# Altium PCB projet_pcb_naked_f103.PCBDOC
Units mil, origin at the board's own origin, x right, y up, seen from the top; angles counter-clockwise.
Board outline 2640 x 1955 mil, 4 copper layers (TopLayer, POWER, GND, BottomLayer), stack 70.156 mil thick; 39 components, 29 nets, 140 pads, 20 vias.
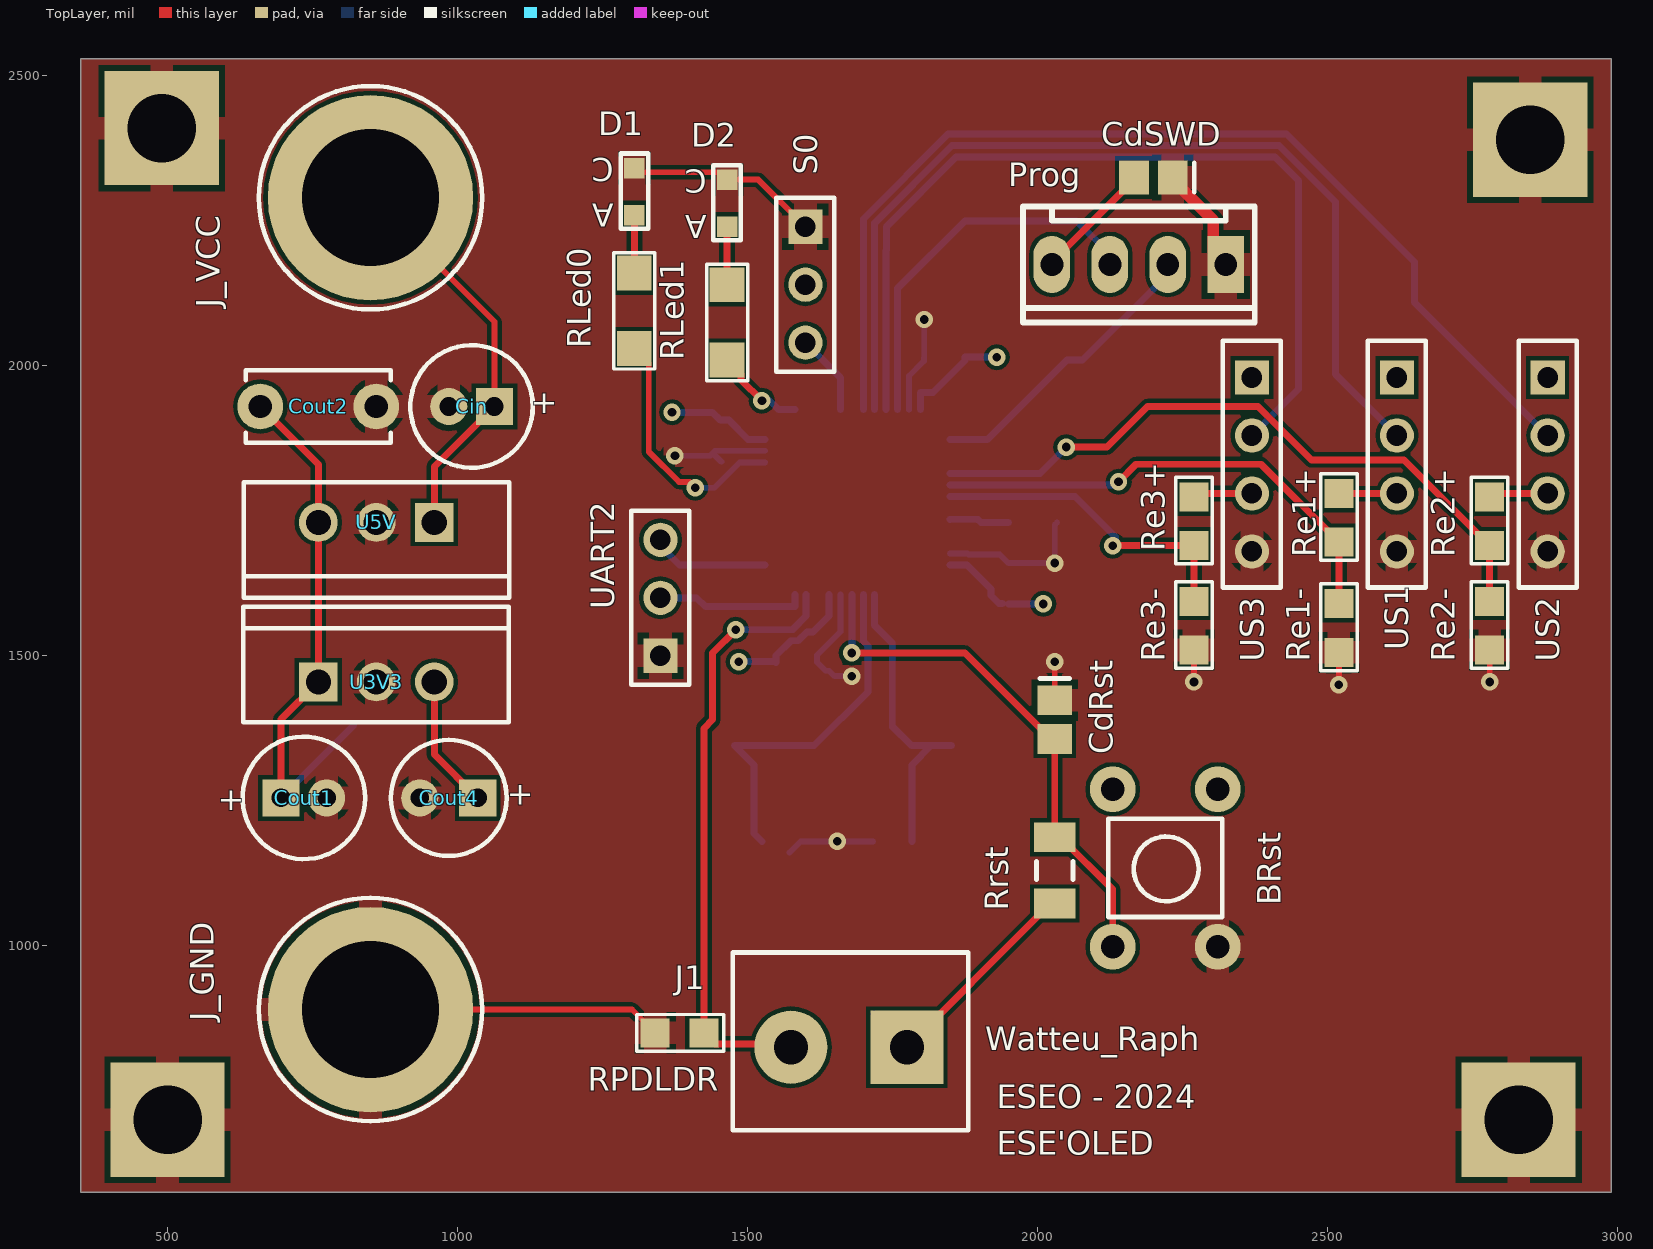
[diagram p0: TopLayer view]
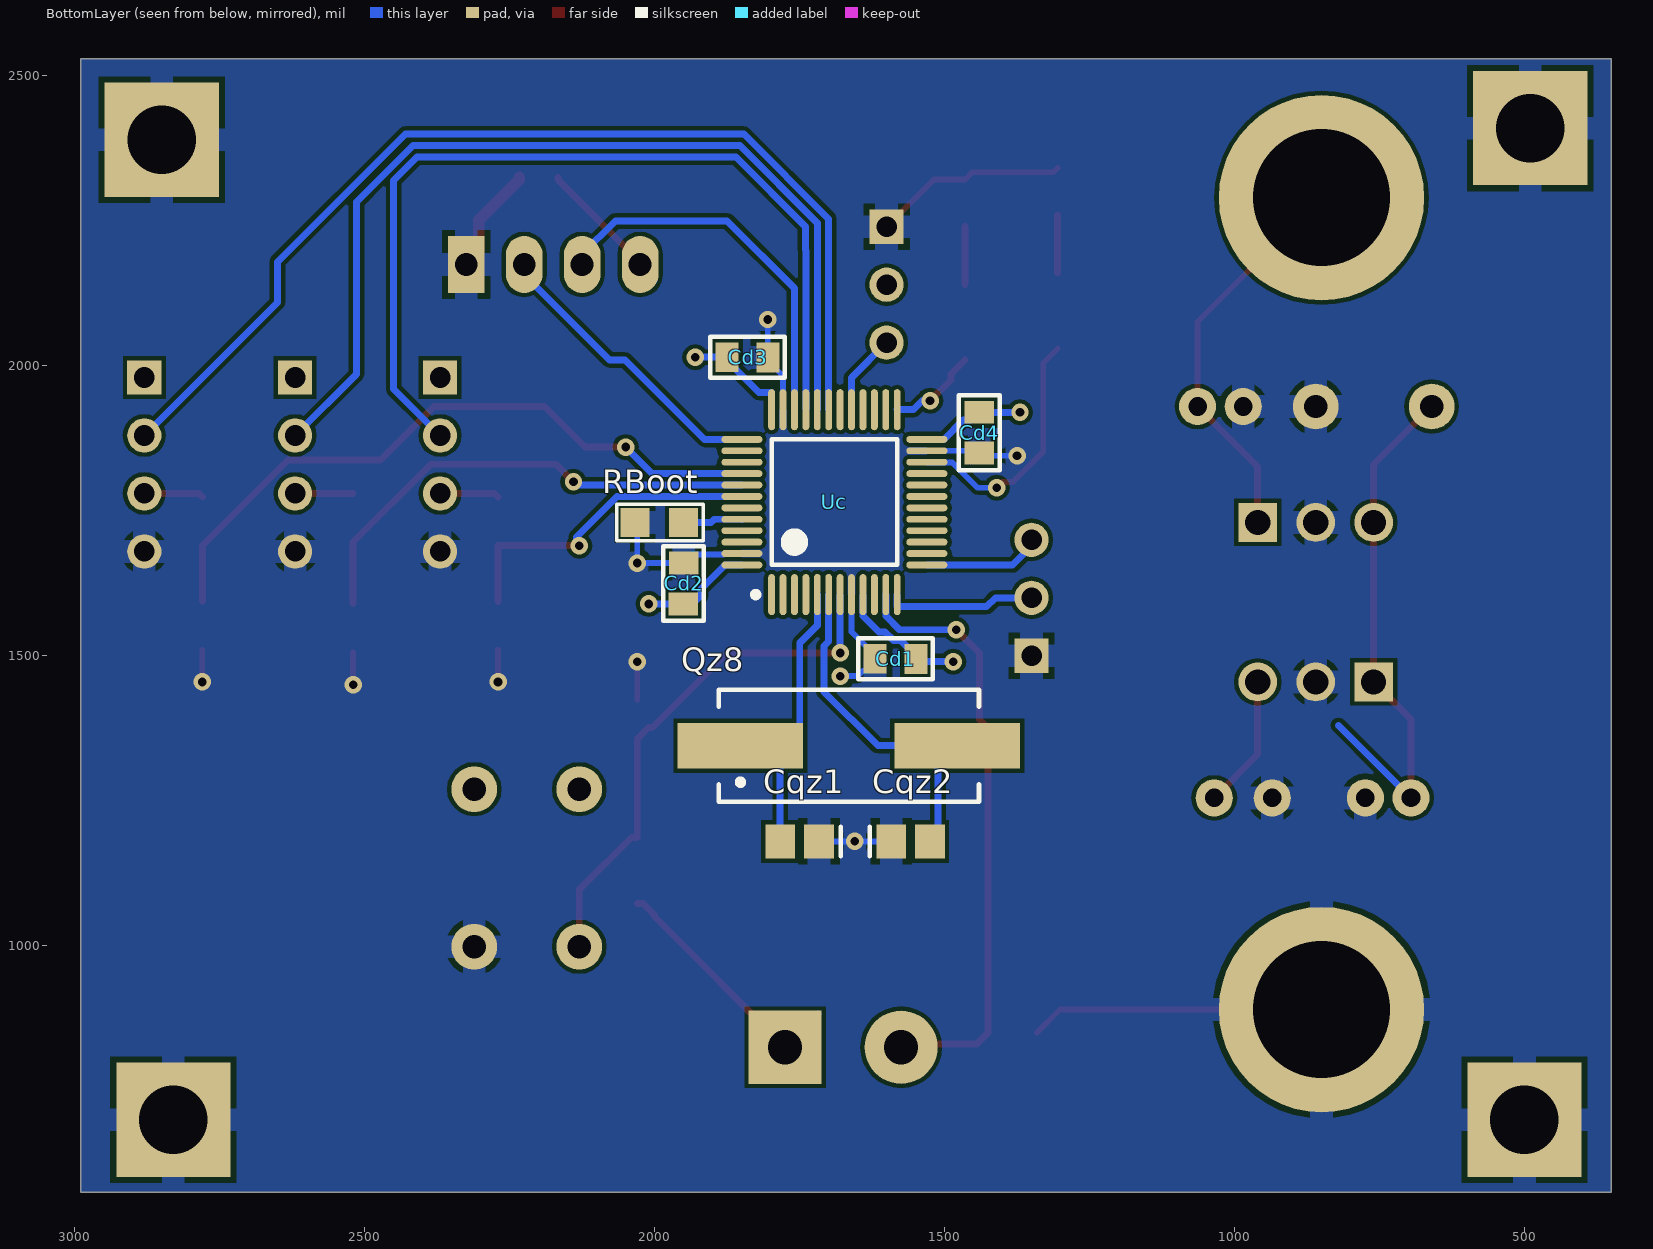
[diagram p1: BottomLayer view, seen from below]
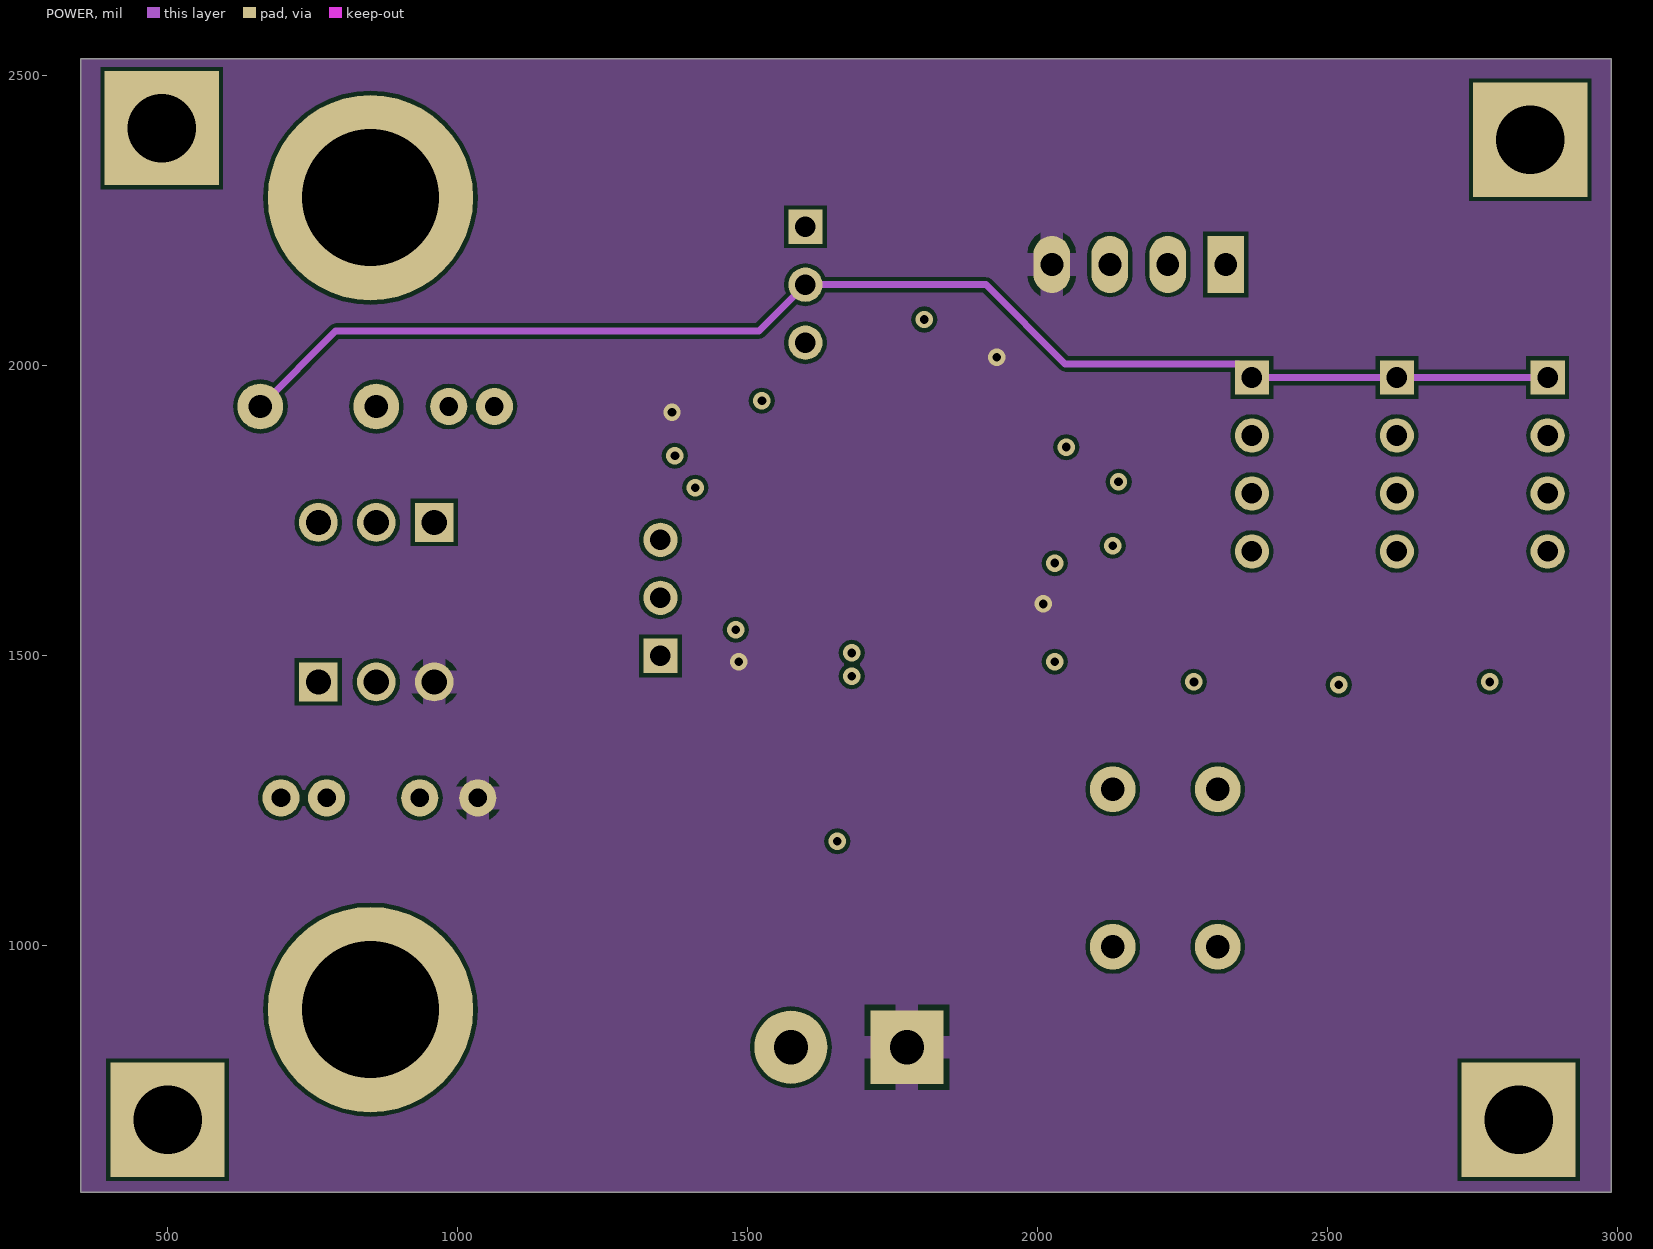
[diagram p2: POWER]
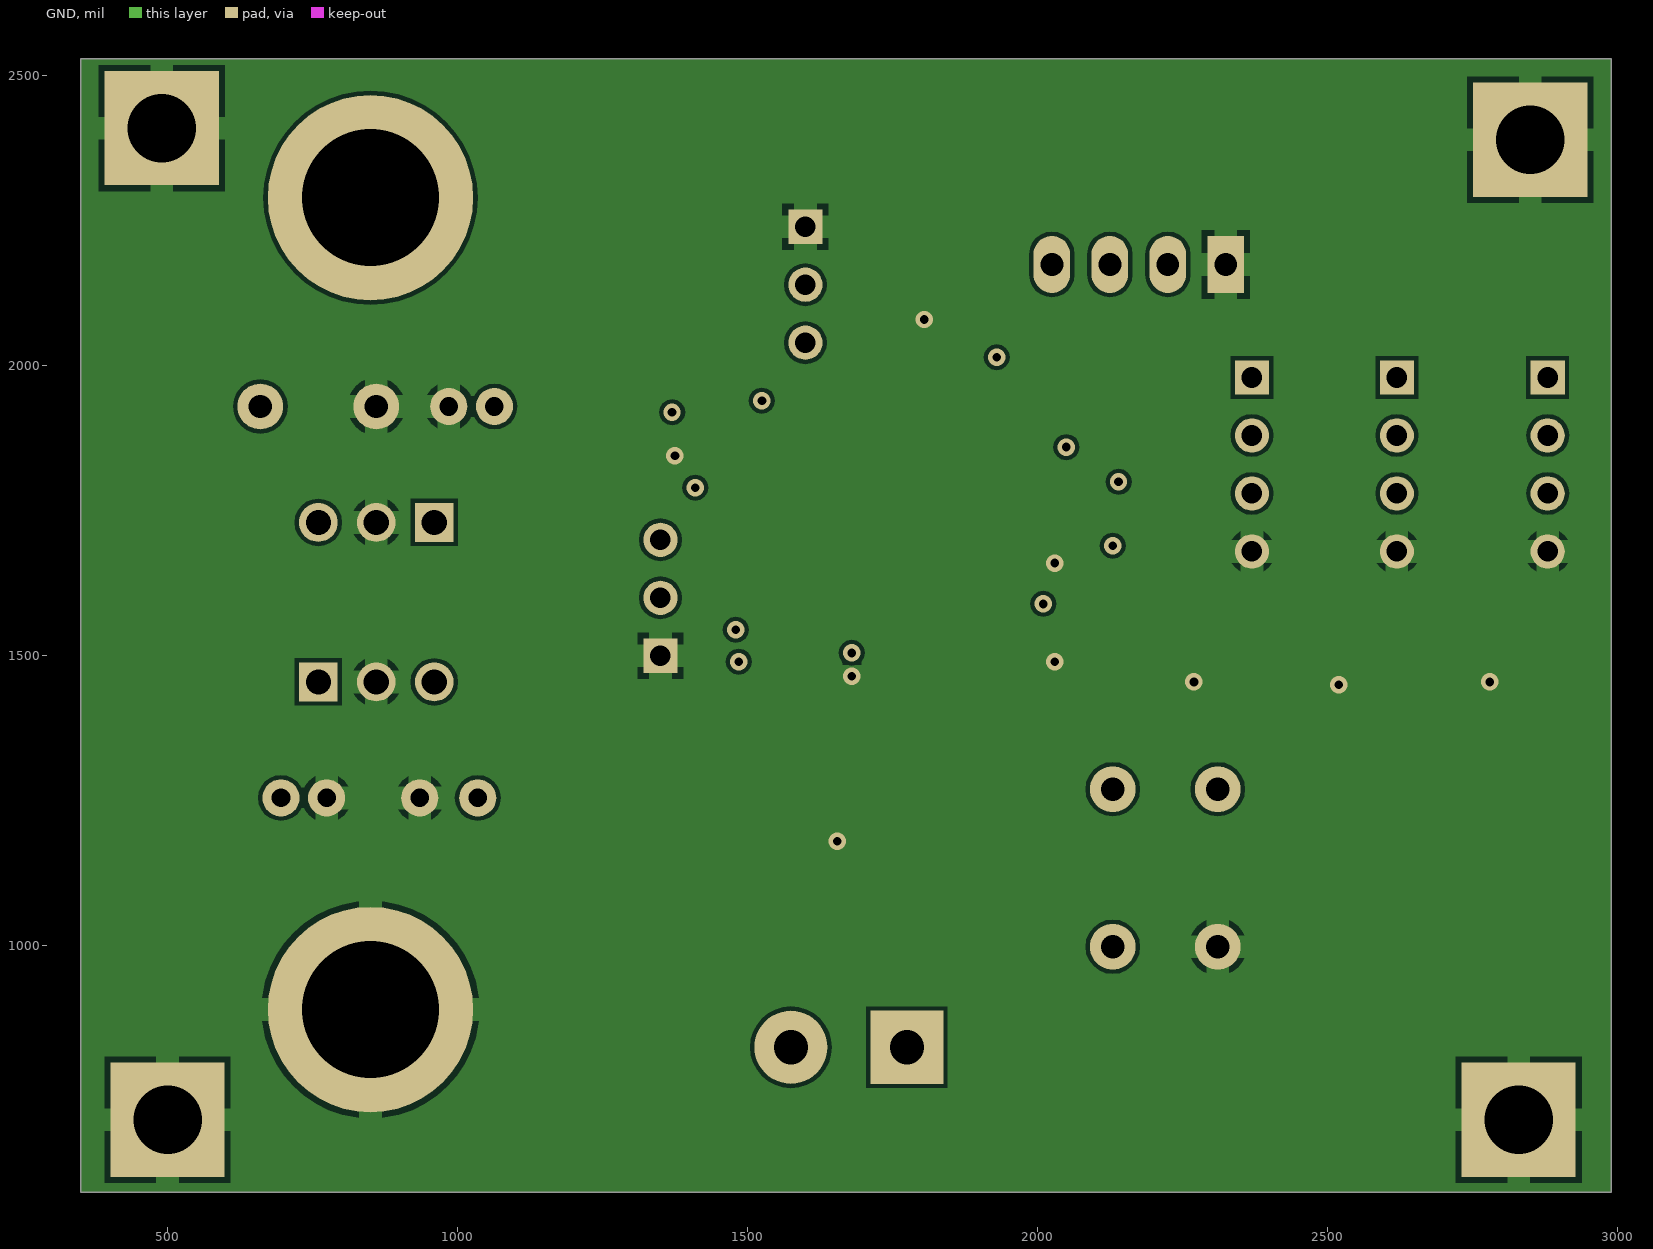
[diagram p3: GND]
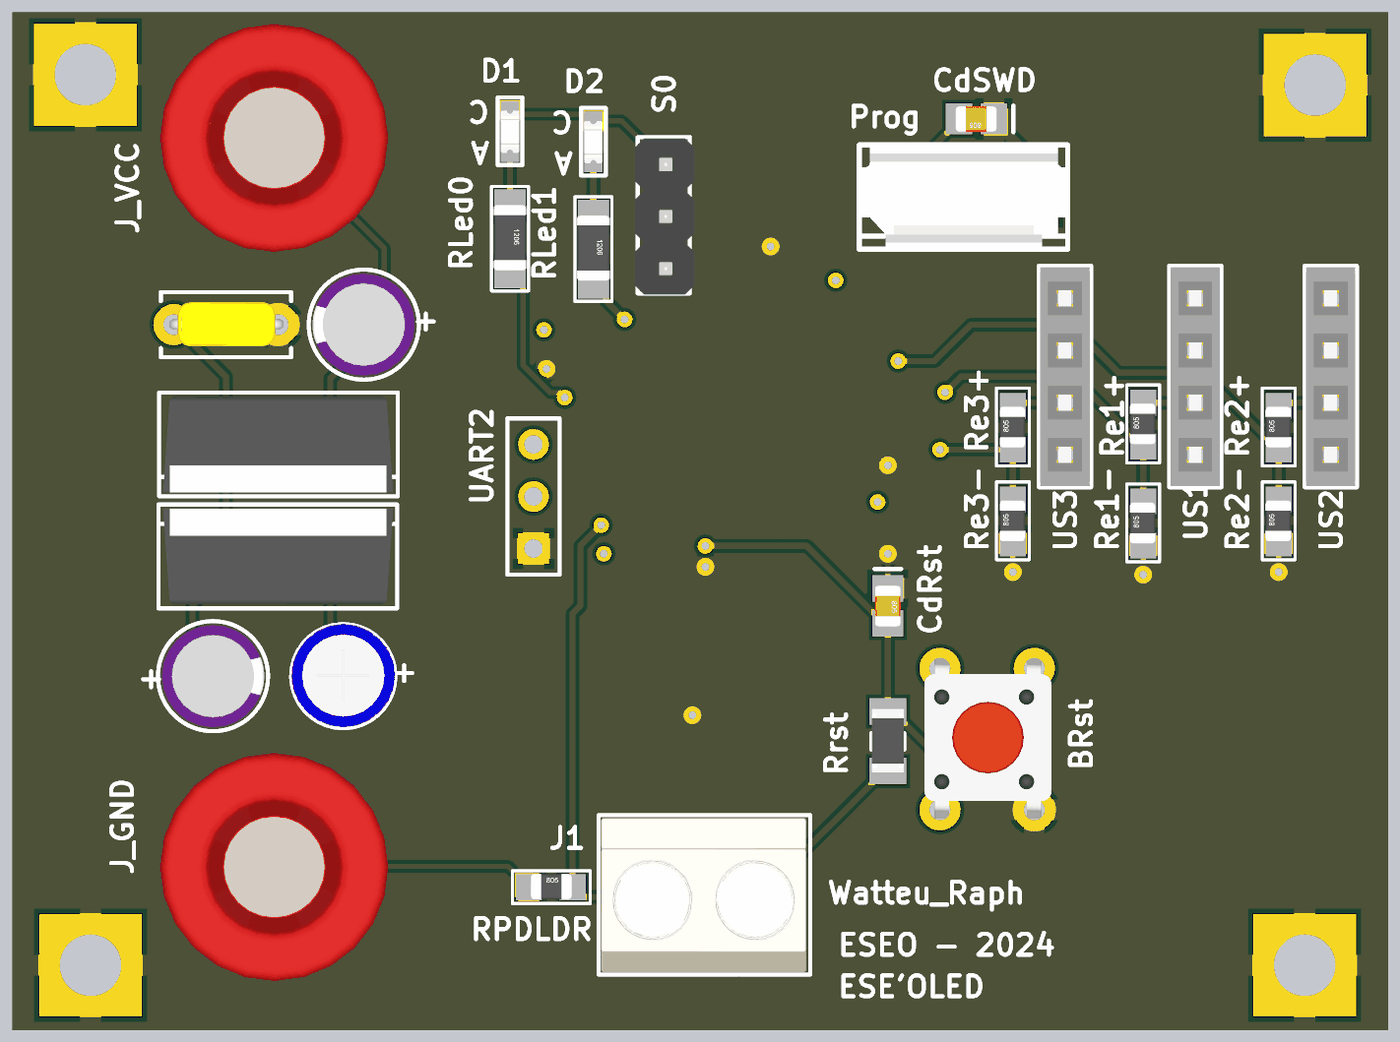
[diagram p4: 3D render of the assembled board from above, using the file's embedded part models]
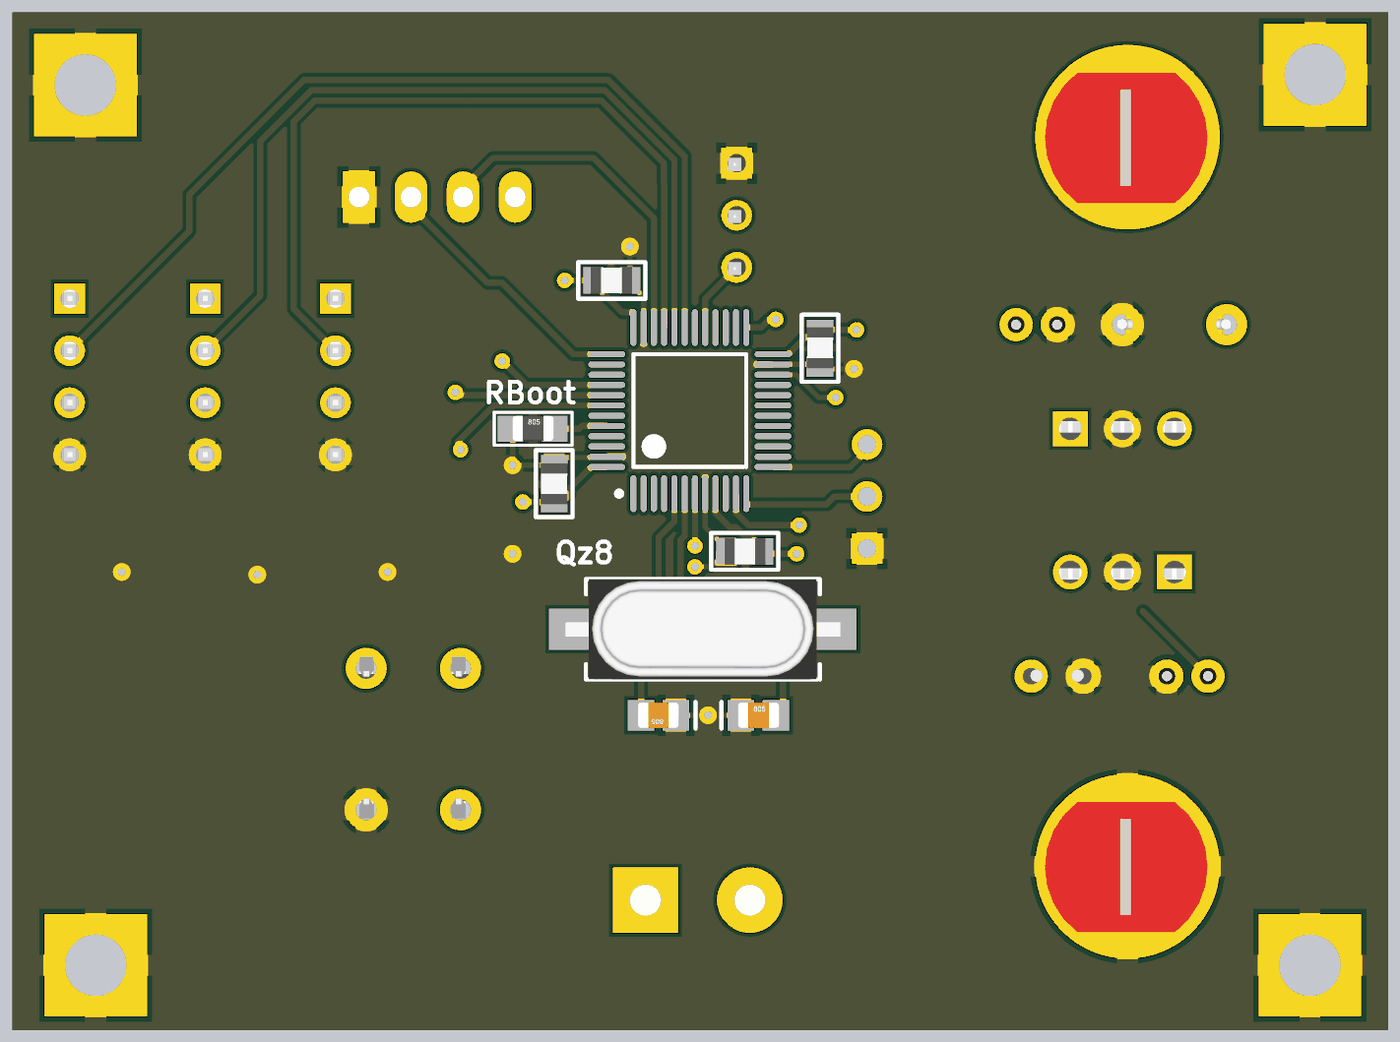
[diagram p5: 3D render of the assembled board from below, using the file's embedded part models]

## Layer stack, top to bottom
TopSolder: solder mask 0.4, Solder Resist, Dk 3.5
TopLayer: signal copper 1.4
Dielectric 1: prepreg 2.8, PP-006, Dk 4.1
POWER: signal copper 1.3779
Dielectric1: core 59, Core-043, Dk 4.3
GND: signal copper 1.3779
Dielectric 2: prepreg 2.8, PP-006, Dk 4.1
BottomLayer: signal copper 1.4
BottomSolder: solder mask 0.4, Solder Resist, Dk 3.5

## Board outline
350,575 350,2530 2990,2530 2990,575

## Design rules (kind name [scope] priority, off if disabled: settings)
Clearance PowerPlaneClearance [InNamedPolygon('Bot-GND') Or  InNamedPolygon('Top-GND')] p1: gap=10 ignorepadtopadclearanceinfootprint=FALSE
Clearance [All] p2: gap=7 ignorepadtopadclearanceinfootprint=TRUE
FabricationTestPointUsage TestPointUsage [All] p1: valid=0 allowmultiple=FALSE
FabricationTestpoint Testpoint [All] p1: side=3 testpointundercomponent=TRUE minsize=40 maxsize=100 preferedsize=60 minholesize=20 maxholesize=40 preferedholesize=32 testpointgrid=1 allowsidetop=TRUE allowsidebottom=TRUE usegrid=TRUE gridtolerance=0.01
Height [All] p1: minheight=0 maxheight=2000 prefheight=500
HoleSize [All] p1: absolutevalues=TRUE maxlimit=300 minlimit=11.81 maxpercent=80.000 minpercent=20.000
PlaneClearance [All] p1: clearance=40
PlaneConnect [All] p1: planeconnectstyle=Relief reliefexpansion=19.68 reliefentries=4 reliefconductorwidth=40 reliefairgap=19.68
PolygonConnect [All] p1: connectstyle=Relief reliefconductorwidth=40 reliefentries=4 polygonreliefangle="90 Angle" airgapwidth=10
RoomDefinition projet_pcb_naked_f103 [InComponentClass('projet_pcb_naked_f103')] p1: confinementstyle=ConfineIn formatcopy=TRUE lockcomponents=FALSE outline -4000,-6000 -2000,-6000 -2000,-5000 -4000,-5000
RoutingVias [All] p1: holewidth=23.62 width=60 viastyle="Through Hole" minholewidth=23.62 minwidth=60 maxholewidth=23.62 maxwidth=60
SilkToSolderMaskClearance SilkscreenOverComponentPads [IsPad] p1: minsilkscreentomaskgap=10 clearancetoexposedcopper=TRUE
SolderMaskExpansion [All] p1: expansion=2
Width [All] p1: maxlimit=1000 minlimit=10 preferedwidth=20
23 further rules are at their usual default settings.

## Components (designator, comment, footprint, x,y, rotation, side; value= is the part's Value field where it differs from the comment)
BRst "BOUTON_POUSSOIR_MINIATURE_TRAVERSANT" BOUTON_POUSSE_PLAT_6x6 2122.13,982.6 r0 top
Cd1 "CMS_0805" CONDENSATEUR_CMS_0805 1620,1495 r180 bottom value=100nF
Cd2 "CMS_0805" CONDENSATEUR_CMS_0805 1950,1660 r270 bottom value=100nF
Cd3 "CMS_0805" CONDENSATEUR_CMS_0805 1804.53,2014.61 r0 bottom value=100nF
Cd4 "CMS_0805" CONDENSATEUR_CMS_0805 1440.39,1849.53 r90 bottom value=100nF
CdRst "Condensateur 0805" C0805_N 2030,1390 r270 top value=100nF
CdSWD "Condensateur 0805" C0805_N 2200,2325 r180 top value=100nF
Cin "CONDENSATEUR_POL_ELECTROLY_RAD_2.0/5.08" CONDENSATEUR_POLARISE_ELECTROLYTIQUE_RADIAL_2.0/5.08 1024.37,1930 r180 top value=10µF/>25V
Cout1 "CONDENSATEUR_POL_ELECTROLY_RAD_2.0/5.08" CONDENSATEUR_POLARISE_ELECTROLYTIQUE_RADIAL_2.0/5.08 735,1255 r0 top value=1µF/>10V
Cout2 "CONDENSATEUR_CER_RAD_5.08" CONDENSATEUR_CERAMIQUE_RADIAL_5.08 860,1930 r180 top value=100nF
Cout4 "CONDENSATEUR_POL_ELECTROLY_RAD_2.54/5.08" CONDENSATEUR_POLARISE_ELECTROLYTIQUE_RADIAL_2.54/5.08 1035,1255 r180 top value=4.7µF/63V
Cqz1 "Condensateur 0805" C0805_N 1750,1180 r0 bottom value=20pF
Cqz2 "Condensateur 0805" C0805_N 1558.46,1180 r180 bottom value=20pF
D1 "LED_CMS_0805" LED_CMS_0805 1305,2260 r180 top
D2 "LED_CMS_0805" LED_CMS_0805 1465,2240 r180 top
J1 "BORNIER2 DROIT A VIS" BORNIER2_A_VIS 1775,825 r180 top
J_GND "DOUILLE BANANE 4mm" DOUILLE_BANANE_4mm 850,890 r0 top
J_VCC "DOUILLE BANANE 4mm" DOUILLE_BANANE_4mm 850,2290 r0 top
Prog "BARRETTE4" HE14_4 2325,2175 r180 top
Qz8 "Hz" HC49/4H_SMX 1665,1345 r180 bottom
RBoot "RESISTANCE_CMS_0805" RESISTANCE_CMS_0805 2034,1730 r180 bottom value=100K
Re1+ "RESISTANCE_CMS_0805" RESISTANCE_CMS_0805 2520,1696 r90 top value=2.2K
Re1- "RESISTANCE_CMS_0805" RESISTANCE_CMS_0805 2520,1506 r90 top value=2.2K
Re2+ "RESISTANCE_CMS_0805" RESISTANCE_CMS_0805 2780,1690 r90 top value=2.2K
Re2- "RESISTANCE_CMS_0805" RESISTANCE_CMS_0805 2780,1510 r90 top value=2.2K
Re3+ "RESISTANCE_CMS_0805" RESISTANCE_CMS_0805 2270,1690 r90 top value=2.2K
Re3- "RESISTANCE_CMS_0805" RESISTANCE_CMS_0805 2270,1510 r90 top value=2.2K
RLed0 "RESISTANCE_CMS_1206" RESISTANCE_CMS_1206 1305,2160 r270 top value=150
RLed1 "RESISTANCE_CMS_1206" RESISTANCE_CMS_1206 1465,2140 r270 top value=150
RPDLDR "RESISTANCE_CMS_0805" RESISTANCE_CMS_0805 1341,850 r0 top value=10K
Rrst "10k" R1206_N 2030,1130 r90 top
S0 "BARRETTE 3 CONTACTS 1 RANGEE MALE DROITE" BARRETTE_3_M_D 1600,2240 r270 top (schematic designator Servo0)
U3V3 "REGULATEUR_TO220_78XX" REGULATEUR_TO220_78XX 860,1455 r0 top
U5V "REGULATEUR_TO220_78XX" REGULATEUR_TO220_78XX 860,1730 r180 top
UART2 "BARRETTE3" HDR1X3 1350,1500 r90 top
Uc "STM32F103C8T6" STM-LQFP48_N 1690,1765 r90 bottom
US1 "BARRETTE_4 CONTACTS_1 RANGEE_FEMELLE_DROITE" BARRETTE_4_F_D 2620,1980 r270 top
US2 "BARRETTE_4 CONTACTS_1 RANGEE_FEMELLE_DROITE" BARRETTE_4_F_D 2880,1980 r270 top
US3 "BARRETTE_4 CONTACTS_1 RANGEE_FEMELLE_DROITE" BARRETTE_4_F_D 2370,1980 r270 top

## Footprints (in the part's own frame and the unit in brackets; to place one, negate y for a bottom-side part, rotate by r counter-clockwise, add the part's x,y. Pads: shape width x height; smd on the part's side, far side on the other; paste and mask are expansions set on the pad)
BARRETTE_3_M_D [mm] "BARRETTE 3 CONTACTS ; 1 RANGEE ; DROITE ; MALE ; ESPACEMENT BROCHES = 2.54 mm"
  rect 1.5x1.5 hole 0.9: 1(0,0)
  round 1.5 hole 0.9: 2(2.54,0) 3(5.08,0)
  silkscreen extent -1.27,-1.27 6.35,1.27, body extent -1.21,-1.42 6.41,1.5, height 8.61
BARRETTE_4_F_D [mm] "BARRETTE 4 CONTACTS ; 1 RANGEE ; DROITE ; FEMELLE ; ESPACEMENT BROCHES = 2.54 mm"
  rect 1.5x1.5 hole 0.9: 1(0,0)
  round 1.5 hole 0.9: 2(2.54,0) 3(5.08,0) 4(7.62,0)
  silkscreen extent -1.6,-1.27 9.2,1.27, body extent -1.53,-1.21 9.13,1.2, height 8.5
BORNIER2_A_VIS [mm] "BORNIER 2 PLOTS A VIS ; VERTICAL ; ESPACEMENT BROCHES = 5.08mm"
  rect 3.2x3.2 hole 1.5: 1(0,0)
  round 3.2 hole 1.5: 2(5.08,0)
  silkscreen extent -2.69,-4.15 7.62,3.63, body extent -2.5,-4 7.5,3.5, height 10
BOUTON_POUSSE_PLAT_6x6 [mil] "BOUTON POUSSOIR MINIATURE ON/OFF; BOUTON PLAT/LONG ; ESPACEMENT BROCHES = 7.62mm/5.08mm"
  round 79 hole 40: 1(7.87,15.75) 2(188.98,15.75) 3(188.98,287.4) 4(7.87,287.4)
  silkscreen extent 0,67 197,236, body extent -22,-1 222,310, height 276
C0805_N [mm] "Chip Capacitor, Body 2.0x1.3mm, IPC Medium Density"
  rect 1.3x1.5 smd: 1(-0.85,0) 2(0.85,0)
  silkscreen extent -1.8,-0.65 -1.8,0.65, body extent -0.99,-0.63 1.01,0.63, height 0.8
CONDENSATEUR_CERAMIQUE_RADIAL_5.08 [mil] "CONDENSATEUR TRAVERSANT CERAMIQUE RADIAL ; DIMENSIONS : 3.17mm x 5.08mm"
  round 79 hole 40: 1(0,0) 2(200,0)
  silkscreen extent -25,-62 225,63, body extent -11,-43 209,42, height 148
CONDENSATEUR_CMS_0805 [mm] "CONDENSATEUR CMS 0805 ; DIMENSIONS : 2mm x 1.25mm"
  rect 1x1.3 smd: 1(0,0) 2(1.79,-0.01)
  silkscreen extent -0.74,-0.9 2.53,0.89, body extent -0.09,-0.67 1.91,0.64, height 0.73
CONDENSATEUR_POLARISE_ELECTROLYTIQUE_RADIAL_2.0/5.08 [mil] "CONDENSATEUR POLARISE ELECTROLYTIQUE RADIAL ; DIAMETRE : 5.08mm ; ESPACEMENT BROCHES : 2mm"
  rect 64x64 / inner round 64 / far side round 64 hole 32: 1(-39.37,0)
  round 64 hole 32: 2(39.37,0)
  silkscreen extent -106,-106 105,106, body extent -98,-98 98,98, height 433
CONDENSATEUR_POLARISE_ELECTROLYTIQUE_RADIAL_2.54/5.08 [mil] "CONDENSATEUR_POLARISE_ELECTROLYTIQUE_RADIAL ; DIAMETRE : 5.08mm ; ESPACEMENT BROCHES : 2.54mm"
  rect 64x64 / inner round 64 / far side round 64 hole 32: 1(0,0)
  round 64 hole 32: 2(100,0)
  silkscreen extent -50,-100 150,100, body extent -50,-101 149,98, height 446
DOUILLE_BANANE_4mm [mm] "DOUILLE BANANE ; DIAMETRE PASSAGE CONTACT = 4 mm ; DIAMETRE PERCAGE = 6 mm"
  round 9 hole 6: 1(0,0)
  silkscreen extent -4.89,-4.89 4.89,4.89, body extent -5.5,-5.6 5.63,5.53, height 4.79
HC49/4H_SMX [mm] "Quartz Crystal, SM; Body 13.4 (inc. leads) x 4.9 mm (LxW max)"
  rect 5.5x2 smd: 1(-4.75,0) 2(4.75,0)
  silkscreen extent -5.7,-2.45 5.7,2.45, body extent -6.7,-2.45 6.7,2.45, height 5.08
HDR1X3 [mm] "Connector; Header; 3 Position"
  rect 1.5x1.5 hole 0.9: 1(0,0)
  round 1.5 hole 0.9: 2(2.54,0) 3(5.08,0)
  silkscreen extent -1.27,-1.27 6.35,1.27
HE14_4 [mm] "Connector; HE14; 4 Position; Pin Spacing=2.54mm"
  rect 1.6x2.5 hole 1: 1(0,0)
  oval 1.6x2.5 hole 1: 2(2.54,0) 3(5.08,0) 4(7.62,0)
  silkscreen extent -1.27,-2.54 8.89,2.54, body extent -1.3,-2.45 8.86,2.55, height 11.42
LED_CMS_0805 [mm] "LED CMS 0805 ; DIMENSIONS : 2.0mm x 0.9mm"
  rect 0.9x0.9 smd: 1(0,0) 2(0,-2.063)
  silkscreen extent -0.6,-2.7 0.6,0.6, body extent -0.45,-2.06 0.45,0, height 0.85
R1206_N [mm] "Chip Resistor, Body 3.2x1.6mm, IPC Medium Density"
  rect 1.3x1.8 smd: 1(-1.45,0) 2(1.45,0)
  silkscreen extent -0.4,-0.8 0.4,0.8, body extent -1.68,-0.87 1.68,0.87, height 0.71
REGULATEUR_TO220_78XX [mm] "BOITIER TO220 ; DIMENSIONS : 11.2mm x 4.7mm ; ESPACEMENT BROCHES : 2.54 mm"
  rect 1.7x1.7 hole 1.1: 1(-2.54,0)
  round 1.7 hole 1.1: 2(0,0) 3(2.54,0)
  silkscreen extent -5.83,-1.77 5.8,3.29, body extent -5.61,-1.59 5.61,3.1, height 19.33
RESISTANCE_CMS_0805 [mil] "RESISTANCE CMS 0805 ; DIMENSIONS : 2mm x 1.25mm"
  rect 50x50 smd: 1(0,0) 2(84,0)
  silkscreen extent -31,-31 118,31, body extent 4,-24 83,26, height 31
RESISTANCE_CMS_1206 [mil] "RESISTANCE CMS 1206 ; DIMENSIONS : 3.2mm x 1.6mm"
  rect 60x60 smd: 1(0,0) 2(130,0)
  silkscreen extent -35,-35 165,35, body extent 0,-31 126,31, height 39
STM-LQFP48_N [mm] "QFP, 48-Leads, Body 7x7mm, Pitch 0.5mm, IPC Medium Density"
  oval 1.8x0.3 smd: 1(-4.05,2.75) 2(-4.05,2.25) 3(-4.05,1.75) 4(-4.05,1.25) 5(-4.05,0.75) 6(-4.05,0.25) 7(-4.05,-0.25) 8(-4.05,-0.75) 9(-4.05,-1.25) 10(-4.05,-1.75) 11(-4.05,-2.25) 12(-4.05,-2.75) 25(4.05,-2.75) 26(4.05,-2.25) 27(4.05,-1.75) 28(4.05,-1.25) 29(4.05,-0.75) 30(4.05,-0.25) 31(4.05,0.25) 32(4.05,0.75) 33(4.05,1.25) 34(4.05,1.75) 35(4.05,2.25) 36(4.05,2.75)
  oval 0.3x1.8 smd: 13(-2.75,-4.05) 14(-2.25,-4.05) 15(-1.75,-4.05) 16(-1.25,-4.05) 17(-0.75,-4.05) 18(-0.25,-4.05) 19(0.25,-4.05) 20(0.75,-4.05) 21(1.25,-4.05) 22(1.75,-4.05) 23(2.25,-4.05) 24(2.75,-4.05) 37(2.75,4.05) 38(2.25,4.05) 39(1.75,4.05) 40(1.25,4.05) 41(0.75,4.05) 42(0.25,4.05) 43(-0.25,4.05) 44(-0.75,4.05) 45(-1.25,4.05) 46(-1.75,4.05) 47(-2.25,4.05) 48(-2.75,4.05)
  silkscreen extent -4.17,-2.75 2.75,3.58, body extent -3.5,-3.5 3.5,3.5, height 1.6

## Part data
BRst: "BOUTON POUSSOIR MINIATURE TRAVERSANT ON/OFF", Type=B_POUSS_MINI_T
Cd1 Cd2 Cd3 Cd4: library part CONDENSATEUR_CMS_CER_0805, "CONDENSATEUR CMS CERAMIQUE 0805", Type=CMS_0805
CdRst CdSWD Cqz1 Cqz2: library part CONDENSATEUR_CER_RAD_5.08, Type=RADIAL_5.08
Cin Cout1: "CONDENSATEUR POLARISE ELECTROLYTIQUE RADIAL 2.0/5.08", Type=POL_RAD_2.0/5.08
Cout2: "CONDENSATEUR TRAVERSANT CERAMIQUE RADIAL 5.08mm", Type=RADIAL_5.08
Cout4: "CONDENSATEUR POLARISE ELECTROLYTIQUE RADIAL 2.54/5.08", Type=POL_RAD_2.54/5.08
D1 D2: "LED CMS 0805", Type=CMS_0805
J1: library part "BORNIER2_DROIT_A VIS", "BORNIER 2 PLOTS DROIT A VIS 5.08mm", Type=BORNIER2_D
J_GND J_VCC: library part DOUILLE_BANANE_4mm, "DOUILLE BANANE 4 mm", Type=BANANE_4mm
Prog: "Header, 4-Pin", LatestRevisionDate=17-Jul-2002, LatestRevisionNote="Re-released for DXP Platform.", Publisher="Altium Limited"
Qz8: library part Quartz, "Crystal Oscillator", LatestRevisionDate=17-Jul-2002, LatestRevisionNote="Re-released for DXP Platform.", PackageReference=R38, Published=8-Jun-2000, Publisher="Altium Limited"
RBoot Re1+ Re1- Re2+ Re2- Re3+ Re3- RPDLDR: "RESISTANCE CMS 0805", Type=CMS_0805
RLed0 RLed1: "RESISTANCE CMS 1206", Type=CMS_1206
Rrst: library part Resistor, "Resistor", LatestRevisionDate=17-Jul-2002, LatestRevisionNote="Re-released for DXP Platform.", PackageReference=AXIAL-0.5, Published=8-Jun-2000, Publisher="Altium Limited"
S0: library part "BARRETTE_3 CONTACTS_1 RANGEE_MALE_DROITE", Type=M_D_3
U3V3 U5V: "REGULATEUR DE TENSION POSITIVE 78XX BOITIER TO220", Package=(TO220)
  U3V3: Type=LF33CV
  U5V: Type=7805
UART2: "Header, 3-Pin", LatestRevisionDate=17-Jul-2002, LatestRevisionNote="Re-released for DXP Platform.", Publisher="Altium Limited"
Uc: "ARM Cortex-M3 32-bit MCU, 64 KB Flash, 20 KB Internal RAM, 37 I/Os, 48-pin LQFP, -40 to 85 degC, Tray", I/Os (High Current)=37, Operating Frequency(F) (Processor speed) (MHz)=72, Supplier Part Number 1=497-6063-ND, Supply Voltage(Vcc) min (V)=2, A/D Converter="2x12-bit (10 Channel)", ComponentLink1Description="Manufacturer URL", ComponentLink1URL=http://www.st.com/web/en/home.html, ComponentLink2Description=Datasheet, ComponentLink2URL=http://www.st.com/st-web-ui/static/active/en/resource/technical/document/datasheet/CD00161566.pdf, ComponentLink3Description="Package Specification", ComponentLink3URL=http://www.st.com/st-web-ui/static/active/en/resource/technical/document/datasheet/DM00058181.pdf, Core="ARM Cortex-M3", DatasheetVersion="Rev. 16", FLASH Size (Prog) (kB)=64, Internal RAM Size (kB)=20, Mounting Technology="Surface Mount", PackageDescription="48-Pin Low Profile Quad Flat Package, 7 x 7 mm Body, 0.5 mm Pitch", PackageReference=LQFP48, PackageVersion="Rev. 6, 06/2013", Packing=Tray, PartNumber=STM32F103C8T6, Supplier 1=Digi-Key, Supplier 2=Farnell, Supplier 3=Newark, Supplier 4=Newark, Supplier 5=Mouser, Supplier Part Number 2=1447637, Supplier Part Number 3=59M2182, Supplier Part Number 4=57P1222, Supplier Part Number 5=511-STM32F103C8T6
US1 US2 US3: "BARRETTE 4 CONTACTS 1 RANGEE FEMELLE DROITE", Type=F_D_4

## Free pads (board coordinates)
  rect 196.85x196.85 hole 118.11: 1(490,2410) 2(500,700) 3(2830,700) 4(2850,2390)

## Via types
v1: diameter 30, hole 15, TopLayer to BottomLayer, 20 vias

## Nets (pads, with @x,y where several pads share a name; then routed paths per layer and width w, separated by ;. In a path a pad name is that pad's centre, name@x,y a point inside that pad or via, vN(x,y) a via of type N, cw(c..) or ccw(c..) an arc to the next point about the centre after c; other vN are vias at no path point)
+3V3: Cd1.2 Cd2.2 Cd3.2 Cd4.2 CdSWD.2 Cout4.1 J1.1 Prog.4 Rrst.1 U3V3.3 Uc.9 Uc.24 Uc.36 Uc.48 | length 1755.5
  TopLayer w12: U3V3.3 960,1330 Cout4.1 ; J1.1 2000.57,1050.57 2000.57,1053.32 2020.16,1072.91 Rrst.1 ; Prog.4@2025,2157.28 Prog.4 2025,2179.53 2166.54,2321.06 CdSWD.2
  BottomLayer w12: v1(1370,1920) Cd4.2 1453.69,1906.31 1468.17,1906.31 1501.21,1873.27 Uc.24 ; v1(1485,1490) 1548.23,1490 1549.53,1488.7 Cd1.2 1549.53,1500.51 1575.02,1526 1587.34,1526 1602.53,1541.19 1613.01,1541.19 1640.69,1568.88 1640.69,1605.46 Uc.9 ; J1.1@1718.01,881.99 J1.1 ; Uc.36 1798.27,1953.79 1798.36,1953.88 1819.79,1953.88 1875,2009.09 Cd3.2 v1(1930,2015) ; Uc.48 1878.79,1656.73 1920.41,1615.11 1920.41,1603.69 1934.09,1590 Cd2.2@1940,1590 ; Cd2.2 v1(2010.39,1589.53) ; Prog.4@2001.44,2147.53 2025,2171.08 Prog.4 Prog.4@2001.49,2151.49
+5V: Cout1.1 Cout2.2 S0.2 U3V3.1 U5V.3 US1.1 US2.1 US3.1 | length 3293.1
  TopLayer w12: Cout2.2 760,1830 U5V.3 U3V3.1 695.63,1390.63 Cout1.1
  POWER w12: Cout2.2 790,2060 1520,2060 S0.2 1911.37,2140 2047.84,2003.53 2346.47,2003.53 US3.1 US1.1 US2.1
  BottomLayer w12: Cout1.1 820.63,1380
Echo_L: Re1+.1 Re1-.2 Uc.41 | length 847.1
  TopLayer w12: v1(2140,1800) 2170.39,1830.39 2385.61,1830.39 Re1+.1 Re1-.2
  BottomLayer w12: Uc.41 2134.53,1794.53 v1(2140,1800)
Echo_MID: Re2+.1 Re2-.2 Uc.40 | length 1173.9
  TopLayer w12: v1(2050,1860) 2120,1860 2190,1930 2380.14,1930 2472.67,1837.47 2632.53,1837.47 Re2+.1 Re2-.2
  BottomLayer w12: Uc.40 2004.21,1814.21 v1(2050,1860)
Echo_R: Re3+.1 Re3-.2 Uc.42 | length 567.6
  TopLayer w12: v1(2130,1690) Re3+.1 Re3-.2
  BottomLayer w12: Uc.42 2065.16,1774.84 2135.03,1704.97 2135.03,1695.03 v1(2130,1690)
GND: BRst.2 Cd1.1 Cd2.1 Cd3.1 Cd4.1 CdRst.1 CdSWD.1 Cin.2 Cout1.2 Cout2.1 Cout4.2 Cqz1.1 Cqz2.1 D1.2 D2.2 J_GND.1 pad.1 pad.2 pad.3 pad.4 Prog.1 RBoot.1 Re1-.1 Re2-.1 Re3-.1 RPDLDR.1 S0.1 U3V3.2 U5V.2 UART2.1 Uc.8 Uc.23 Uc.35 Uc.47 US1.4 US2.4 US3.4 | length 2272.8
  TopLayer w10: J_GND.1 1301,890 RPDLDR.1 ; D1.2 1312.28,2333.92 1452.28,2333.92 D2.2 1518.8,2321.2 S0.1 ; CdRst.1 v1(2030,1490) ; v1(2270,1455) Re3-.1 ; v1(2520,1450) Re1-.1 ; v1(2780,1455) Re2-.1
  TopLayer w20: CdSWD.1 2233.46,2321.06 2303.5,2251.02 2303.5,2196.5 Prog.1
  BottomLayer w10: UART2.1 UART2.1@1360.39,1489.61 ; v1(1375,1845) 1435.87,1845 Cd4.1 ; Cd4.1@1455.08,1834.84 Cd4.1 ; Uc.23 1444.45,1853.58 Cd4.1 ; Cqz2.1@1572.56,1160.63 Cqz2.1 v1(1655,1180) Cqz1.1 ; S0.1 S0.1@1622.56,2217.44 ; Uc.8 1660.47,1541.38 1620,1500.91 Cd1.1 1620,1489.09 1634.69,1474.41 1640.59,1474.41 1650,1465 v1(1680,1465) ; Uc.35 1778.58,1982.76 1804.53,2008.7 Cd3.1 ; Cd3.1@1805,2014.13 Cd3.1 ; v1(1805,2080) 1805,2015.08 Cd3.1 ; Uc.47 1879.47,1676.42 1881.2,1674.69 1935.31,1674.69 Cd2.1 v1(2030,1660) 2030,1726 RBoot.1
LED0: RLed0.2 Uc.22 | length 432.9
  TopLayer w10: RLed0.2 1330,2005 1330,1851.82 1382.25,1799.57 1400.43,1799.57 v1(1410,1790)
  BottomLayer w10: v1(1410,1790) 1443.11,1790 1486.66,1833.55 1530.2,1833.55 Uc.22
LED1: RLed1.2 Uc.25 | length 158
  TopLayer w12: RLed1.2 1489,1986 1489,1976 v1(1525,1940)
  BottomLayer w12: v1(1525,1940) 1537.99,1940 1553.54,1924.45 Uc.25
NetD1_1: D1.1 RLed0.1 | length 100
  TopLayer w12: RLed0.1 D1.1
NetD2_1: D2.1 RLed1.1 | length 100
  TopLayer w12: RLed1.1 D2.1
NetRBoot_2: RBoot.2 Uc.44 | length 102.9
  BottomLayer w12: Uc.44 1849.54,1735.57 1896.91,1735.57 1902.47,1730 RBoot.2
NetRe1+_2: Re1+.2 US1.3 | length 100
  TopLayer w12: Re1+.2 US1.3
NetRe2+_2: Re2+.2 US2.3 | length 102.5
  TopLayer w12: Re2+.2 2786,1780 US2.3
NetRe3+_2: Re3+.2 US3.3 | length 102.5
  TopLayer w12: Re3+.2 2276,1780 US3.3
PA2_U2TX: UART2.2 Uc.12 | length 258.8
  BottomLayer w12: UART2.2 1412.32,1600 1427.58,1584.74 1581.64,1584.74 1581.73,1584.83 Uc.12
PA3_U2RX: UART2.3 Uc.13 | length 204.9
  BottomLayer w12: UART2.3 1350,1689.19 1382.55,1656.64 1501.12,1656.64 1501.21,1656.73 Uc.13
PA8_PWM1: S0.3 Uc.29 | length 142.6
  BottomLayer w12: S0.3@1600,2038.03 S0.3 1660.47,1979.53 Uc.29
PA13_SDWIO: Prog.3 Uc.34 | length 665.1
  BottomLayer w12: Uc.34 1758.9,2133.9 1875,2250 2067.72,2250 2125,2192.72 Prog.3
PA14_SWDCLK: Prog.2 Uc.37 | length 510.9
  BottomLayer w12: Uc.37 1914.08,1873.27 2051.26,2010.44 2078.16,2010.44 2225,2157.28 Prog.2
PC14_OSC32: Uc.3
PC15_OSC32: Uc.4
PD0_OSCIN: Cqz1.2 Qz8.1 Uc.5 | length 534.6
  BottomLayer w12: Uc.5 1719.53,1552.12 1749.74,1521.91 1749.74,1378.37 1783.11,1345 Qz8.1@1816.83,1345 ; Cqz1.2 1783.46,1311.63 Qz8.1@1816.83,1345 ; Qz8.1 Qz8.1@1816.83,1345
PD1_OSCOUT: Cqz2.2 Qz8.2 Uc.6 | length 623.9
  BottomLayer w12: Cqz2.2 1511.36,1193.64 1511.36,1311.63 Qz8.2 1615,1345 1708,1438 1708,1516.6 1699.84,1524.76 Uc.6
PHOTO: J1.2 RPDLDR.2 Uc.11 | length 1046.1
  TopLayer w12: v1(1480,1545) 1440,1505 1440,1390 1425,1375 RPDLDR.2 1444,831 1569,831 J1.2
  BottomLayer w12: v1(1480,1545) 1577.45,1545 1601.32,1568.88 1601.32,1605.46 Uc.11
RST: BRst.1 CdRst.2 Rrst.2 Uc.7 | length 917.5
  TopLayer w12: v1(1680,1505) 1874.96,1505 2003.84,1376.13 2010.41,1376.13 CdRst.2 Rrst.2 2039.84,1187.09 2130,1096.93 BRst.1
  BottomLayer w12: v1(1680,1505) 1680,1605.39 Uc.7
US_Trigger_L: Uc.32 US1.2 | length 1658.8
  BottomLayer w12: Uc.32 1719.53,2246.4 1853.13,2380 2416.87,2380 2514.43,2282.44 2514.43,1985.57 US1.2
US_Trigger_M: Uc.31 US2.2 | length 1826.3
  BottomLayer w12: Uc.31 1699.84,2253.58 1846.26,2400 2430,2400 2650.5,2179.5 2650.5,2109.5 US2.2
US_Trigger_R: Uc.33 US3.2 | length 1565.3
  BottomLayer w12: Uc.33 1739.21,2199.21 1740,2200 1740,2240 1860,2360 2410,2360 2450,2320 2450,1960 US3.2
VCC: Cin.1 J_VCC.1 U5V.1 | length 691.5
  TopLayer w10: J_VCC.1 1063.74,2076.26 Cin.1
  TopLayer w12: U5V.1 960,1826.26 Cin.1
pads on no net: BRst.3 BRst.4 Uc.1 Uc.2 Uc.10 Uc.14 Uc.15 Uc.16 Uc.17 Uc.18 Uc.19 Uc.20 Uc.21 Uc.26 Uc.27 Uc.28 Uc.30 Uc.38 Uc.39 Uc.43 Uc.45 Uc.46

## Polygon pours and split planes (outlines as drawn)
+3V3 on POWER (solid, pour order 12): 350,575 350,2530 2990,2530 2990,575
no net on POWER (solid, pour order 10): 350,2530
GND on GND (solid, pour order 14): 350,2530 350,575 2990,575 2990,2530
GND on BottomLayer (solid, pour order 16): 350,2530 350,575 2990,575 2990,2530
GND on TopLayer (solid, pour order 20): 350,575 350,2530 2990,2530 2990,575

## Other copper
TopLayer:

## Silkscreen, mask and mechanical layers (free items; w line width, h text height)
TopOverlay:
  text "Watteu_Raph" at 1910,820 h40
  text "ESEO - 2024" at 1930,720 h40
  text "ESE'OLED" at 1930,640 h40
Mechanical1:
  the board outline again, w10

## Text inside footprints (layer, text, board x,y; h text height)
Cin: TopOverlay "+" at 1173.19,1951.65 h40 r180
Cout1: TopOverlay "+" at 586.18,1233.35 h40
Cout4: TopOverlay "+" at 1131.85,1276.65 h40 r180
D1: TopOverlay "C" at 1269.57,2358.43 h39.37 r180; TopOverlay "A" at 1269.57,2279.68 h39.37 r180
D2: TopOverlay "C" at 1429.57,2338.43 h39.37 r180; TopOverlay "A" at 1429.57,2259.68 h39.37 r180